# EAGLE board motor_geared7mm (EAGLE 5.10)

Size 13 x 14 mm. Coordinates in mm from the lower left corner, seen from the top.
Outline: 10,3.45 arc-180 10,10.55 11.73,10.55 arc90 13,11.82 13,12.73 arc90 11.73,14 7.41,14 arc36 6.67,13.76 0.53,9.38 arc54 0,8.35 0,5.65 arc54 0.53,4.62 6.67,0.24 arc36 7.41,0 11.73,0 arc90 13,1.27 13,2.18 arc90 11.73,3.45 10,3.45
Copper layers (1*16): Top 0.035mm / dielectric 1.5mm / Bottom 0.035mm
Design rules "default": minimum track width 10mil, minimum drill 24mil, track to track 8mil, track to pad 8mil, pad to pad 8mil, via to via 8mil, smd to smd 8mil, copper to edge 40mil, drill to drill 8mil, minimum pad ring 10mil, minimum via ring 8mil, stop-mask expansion 4mil, vias tented up to drill 0mil, thermal gap 10mil

## Footprints (pad centres in the part's own frame; a part is rotated, then mirrored left to right if it is on the bottom)
SLOT_SM = smd 3.81 x 3.81 bottom: K 2.845,0 | drill 0.356 round: N 2.032,1.473; O 3.099,1.372; P 3.81,0.559; R 2.032,-1.473; S 3.099,-1.372; T 3.81,-0.559 | smd 3.81 x 3.81: P$1 2.845,0

## Placement (x,y rotation side)
GND  SLOT_SM  [SLOT_SM]  0,7 0 top

## Library data of the parts
GND = arm_4inProp